# EAGLE board servo_1 (EAGLE 6.5.0)
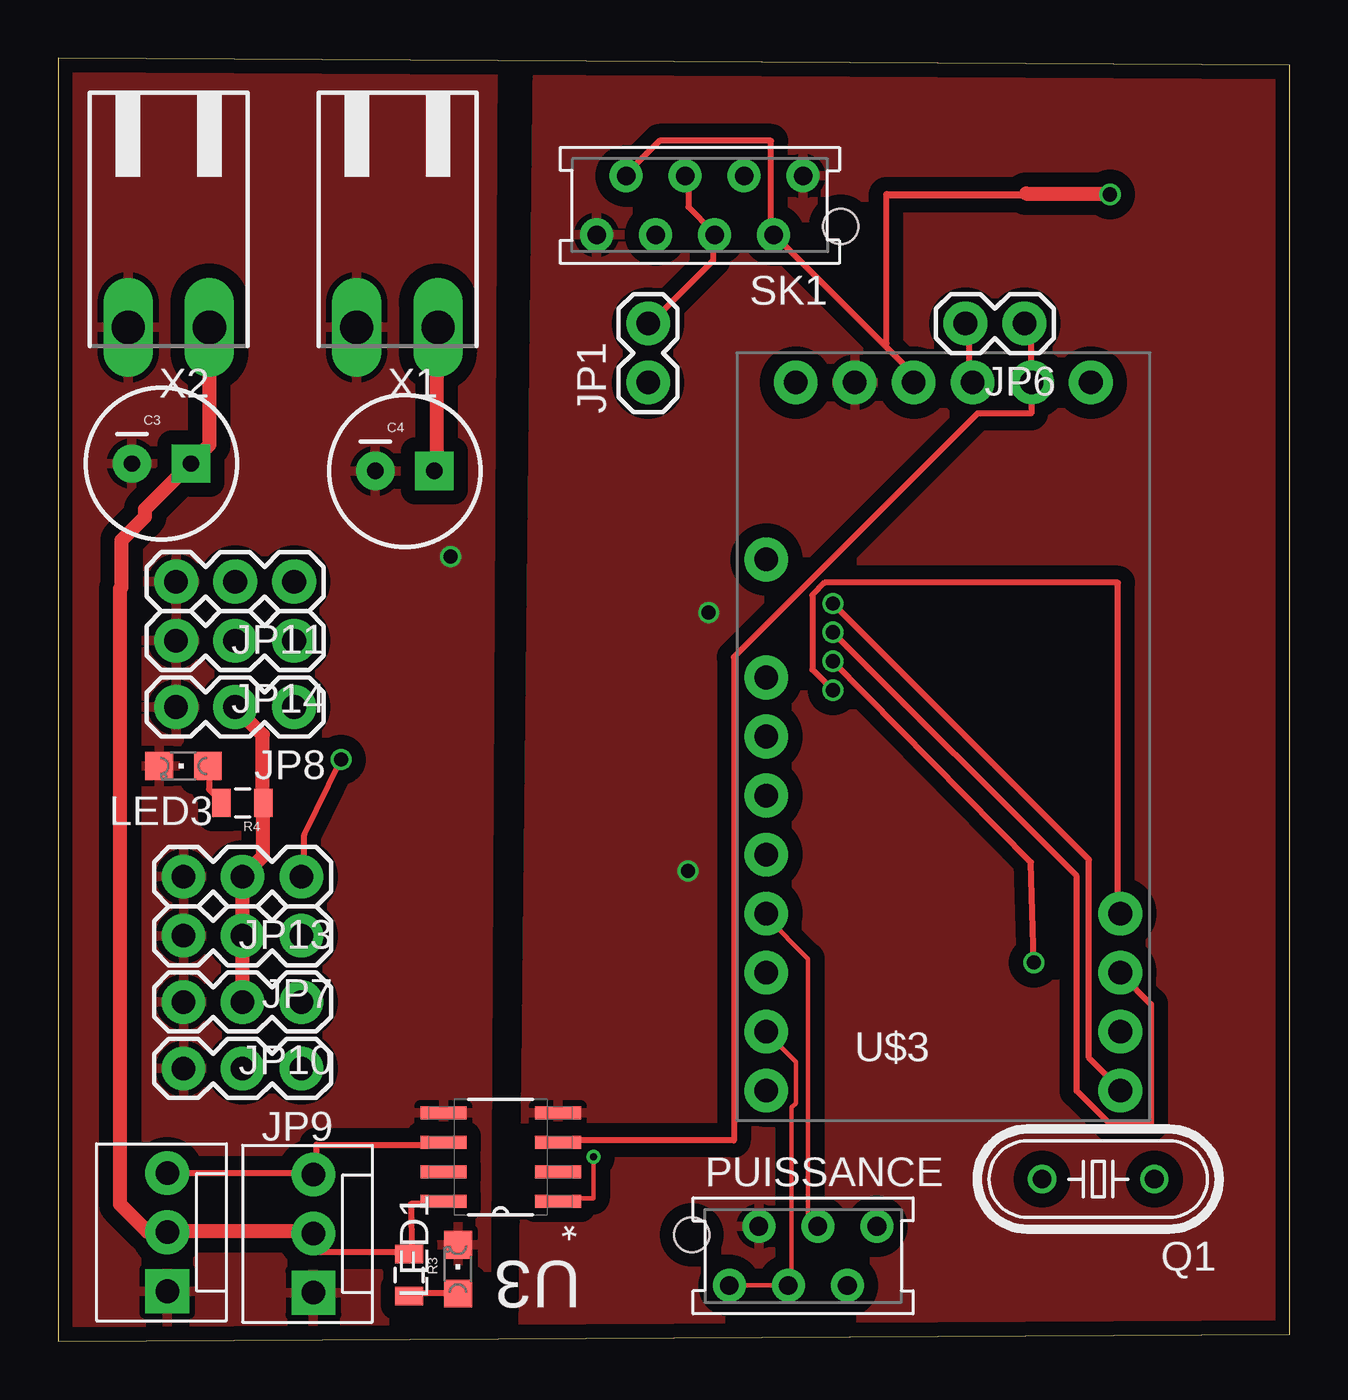
[diagram p0: board, top side]
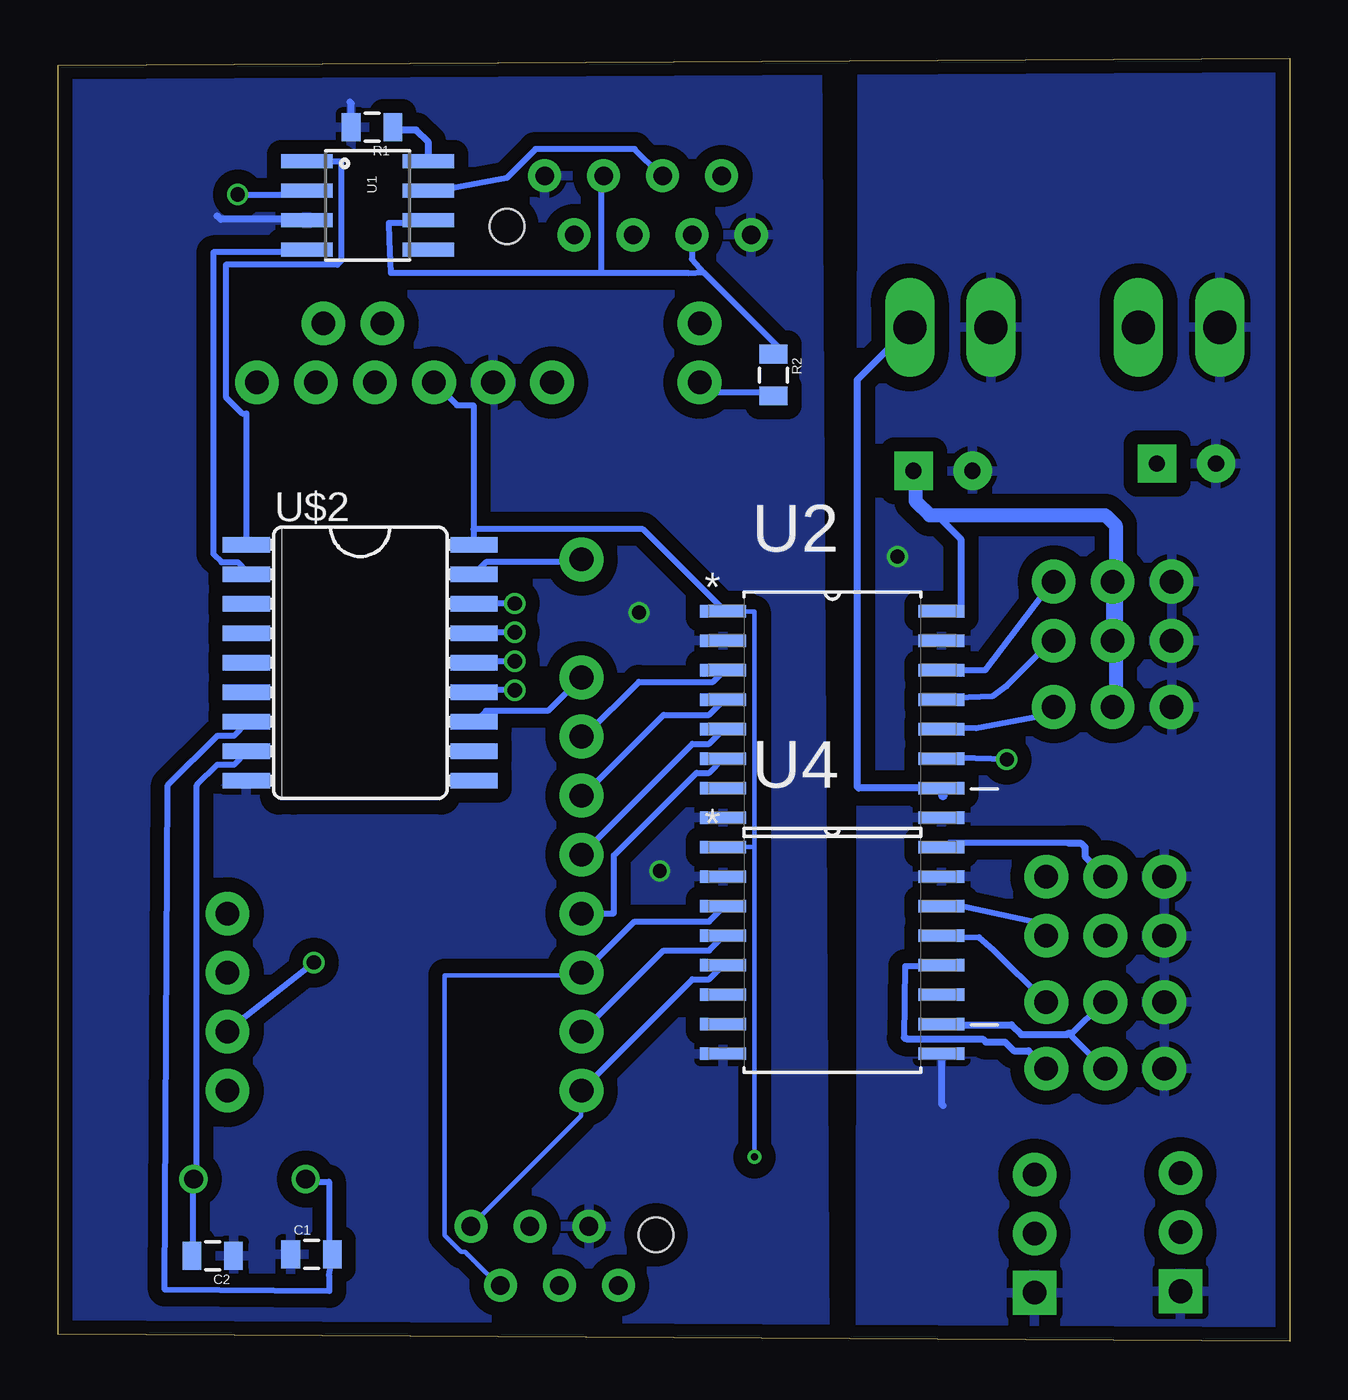
[diagram p1: board, bottom side, seen from below]

Size 53.01 x 55.23 mm. Coordinates in mm from the lower left corner, seen from the top.
Outline: 0,0 53.01,0.32 53.01,54.92 0,55.23 0,0
Copper layers (1*16): Top 0.035mm / dielectric 1.6mm / Bottom 0.035mm
Design rules "dipole": minimum track width 0.2mm, minimum drill 0.3mm, track to track 0.15mm, track to pad 0.15mm, pad to pad 0.15mm, via to via 0.15mm, smd to smd 0.01mm, copper to edge 0.01mm, drill to drill 0.01mm, minimum pad ring 0.15mm, minimum via ring 0.15mm, stop-mask expansion 1mil, vias tented up to drill 0mil, thermal gap 10mil
Net classes: 0 default: clearance 0.205 mm
bRestrict: area 36.5,23.5 to 43.5,34.6

## Footprints (pad centres in the part's own frame; a part is rotated, then mirrored left to right if it is on the bottom)
0805 = smd 0.8 x 1.2: 1 -0.9,0; 2 0.9,0
CPOL-RADIAL-100UF-25V = drill 0.7 pad 1.651 square: 1 1.27,0 | drill 0.7 pad 1.651: 2 -1.27,0
1X02 = drill 1.016 pad 1.88: 1 0,0; 2 2.54,0
MOLEX-1X3 = drill 1.016 pad 1.88 square: 1 0,0 | drill 1.016 pad 1.88: 2 2.54,0; 3 5.08,0
1X03 = drill 1.016 pad 1.88: 1 0,0; 2 2.54,0; 3 5.08,0
CHIPLED_0805 = smd 1.2 x 1.2: A 0,-1.05; C 0,1.05
AMP-215079-6 = drill 0.8 pad 1.422: 1 0,0; 2 1.27,2.54; 3 2.54,0; 4 3.81,2.54; 5 5.08,0; 6 6.35,2.54 | hole 1.5: -1.62,2.175
HC49/S = drill 0.813: 1 -2.413,0; 2 2.413,0
AMP-215079-8 = drill 0.8 pad 1.422: 1 0,-1.27; 2 1.27,1.27; 3 2.54,-1.27; 4 3.81,1.27; 5 5.08,-1.27; 6 6.35,1.27; 7 7.62,-1.27; 8 8.89,1.27 | hole 1.5: -1.62,0.905
SO08 = smd 0.61 x 2.21: 1 -1.905,-2.616; 2 -0.635,-2.616; 3 0.635,-2.616; 4 1.905,-2.616; 5 1.905,2.616; 6 0.635,2.616; 7 -0.635,2.616; 8 -1.905,2.616
SOIC127P1032X265-16N = smd 1.981 x 0.533: 1 -4.699,4.445; 2 -4.699,3.175; 3 -4.699,1.905; 4 -4.699,0.635; 5 -4.699,-0.635; 6 -4.699,-1.905; 7 -4.699,-3.175; 8 -4.699,-4.445; 9 4.699,-4.445; 10 4.699,-3.175; 11 4.699,-1.905; 12 4.699,-0.635; 13 4.699,0.635; 14 4.699,1.905; 15 4.699,3.175; 16 4.699,4.445
SOIC127P600X175-8N = smd 1.981 x 0.559: 1 -2.464,1.905; 2 -2.464,0.635; 3 -2.464,-0.635; 4 -2.464,-1.905; 5 2.464,-1.905; 6 2.464,-0.635; 7 2.464,0.635; 8 2.464,1.905
SO18L = smd 0.66 x 2.032: 1 -5.08,-4.902; 2 -3.81,-4.902; 3 -2.54,-4.902; 4 -1.27,-4.902; 5 0,-4.902; 6 1.27,-4.902; 7 2.54,-4.902; 8 3.81,-4.902; 9 5.08,-4.902; 10 5.08,4.902; 11 3.81,4.902; 12 2.54,4.902; 13 1.27,4.902; 14 0,4.902; 15 -1.27,4.902; 16 -2.54,4.902; 17 -3.81,4.902; 18 -5.08,4.902
ARDUINO_PRO_MINI = drill 1.016 pad 1.88: 3 -7.62,7.62; 5 -7.62,2.54; 6 -7.62,0; 7 -7.62,-2.54; 8 -7.62,-5.08; 9 -7.62,-7.62; 10 -7.62,-10.16; 11 -7.62,-12.7; 12 -7.62,-15.24; 13 7.62,-15.24; 14 7.62,-12.7; 15 7.62,-10.16; 16 7.62,-7.62; BLK -6.35,15.24; GND -3.81,15.24; GRN 6.35,15.24; RXI 1.27,15.24; TXO 3.81,15.24; VCC -1.27,15.24
90-2 = drill 1.422 long: 1 -1.75,5.25; 2 1.75,5.25

## Placement (x,y rotation side)
C1  22pF  [0805]  42.1,3.75 0 bottom
C2  22pF  [0805]  46.35,3.68 180 bottom
C3  100uF  [CPOL-RADIAL-100UF-25V]  4.45,37.78 0 top
C4  100uF  [CPOL-RADIAL-100UF-25V]  14.92,37.47 0 top
JP1  end_lign  [1X02]  25.4,41.28 90 top
JP2  AX-12_1  [MOLEX-1X3]  10.99,2.1 90 top
JP4  AX-12_2  [MOLEX-1X3]  4.7,2.16 90 top
JP6  RX_TX_Connxion  [1X02]  41.59,43.82 180 top
JP7  PWM7  [1X03]  10.48,17.46 180 top
JP8  PWM5  [1X03]  10.16,27.31 180 top
JP9  servo_option_2  [1X03]  10.48,11.75 180 top
JP10  servo_option_1  [1X03]  10.48,14.61 180 top
JP11  PWM3  [1X03]  10.16,32.7 180 top
JP13  PWM6  [1X03]  10.48,20 180 top
JP14  PWM4  [1X03]  10.16,30.16 180 top
LED1  [CHIPLED_0805]  17.21,3.11 0 top
LED3  [CHIPLED_0805]  5.4,24.77 90 top
PUISSANCE  MMATCH-6-  [AMP-215079-6]  28.89,2.41 0 top
Q1  16MHz  [HC49/S]  44.77,6.99 180 top
R1  4,7k  [0805]  39.5,52.26 180 bottom
R2  120  [0805]  22.22,41.59 270 bottom
R3  1k  [0805]  15.11,2.86 270 top
R4  1k  [0805]  7.94,23.18 180 top
SK1  [AMP-215079-8]  32.07,48.9 180 top
U1  MCP2551  [SO08]  39.69,48.9 270 bottom
U2  ADUM1400ARWZ  [SOIC127P1032X265-16N]  19.68,26.99 0 bottom
U3  ADUM1250ARZ  [SOIC127P600X175-8N]  19.05,7.94 180 top
U4  ADUM1400ARWZ  [SOIC127P1032X265-16N]  19.68,16.83 0 bottom
U$2  MCP2515SO  [SO18L]  40,29.21 270 bottom
U$3  ARDUINO_PRO_MINI'SERVO  [ARDUINO_PRO_MINI]  38.1,26.04 0 top
X1  5V_INPUT  [90-2]  14.61,48.9 180 top
X2  12V_INPUT  [90-2]  4.76,48.9 180 top

## Library data of the parts
C1 C2 = SparkFun-Capacitors; MF: AVX; MPN: 08055A220JAT2A; OC_FARNELL: 2280675RL
C3 C4 = SparkFun-Capacitors; MF: RUBYCON; MPN: 100TXW100MEFC8X30; OC_FARNELL: 2346289
JP1 JP6 R1-R4 = SparkFun-Passives; OC_FARNELL: unknown
JP2 JP4 JP7-JP11 JP13 JP14 = SparkFun-Connectors; OC_FARNELL: unknown
LED1 LED3 = adafruit
PUISSANCE = jt-con-micromatch
Q1 = adafruit; MF: MULTICOMP; MPN: HC49SM-3.6864-30-50-60-16-ATF; OC_FARNELL: 1667008; OC_NEWARK: unknown
SK1 = jt-con-micromatch; OC_FARNELL: unknown
U1 = SparkFun-DigitalIC; MF: MICROCHIP; MPN: MCP2551-I/SN...; OC_FARNELL: 2119745
U2 U4 = Analog Devices_By_element14_Batch_1; MF: ANALOG DEVICES; MPN: ADUM1400ARWZ; OC_FARNELL: 1226217; OC_NEWARK: 19M8755; PACKAGE: SOIC-16; SUPPLIER: Analog Devices
U3 = Analog Devices_By_element14_Batch_1; MF: ANALOG DEVICES; MPN: ADUM1250ARZ; OC_FARNELL: 1814353; OC_NEWARK: 27M9880; PACKAGE: SOIC-8; SUPPLIER: Analog Devices
U$2 = MCP2515_MT; OC_FARNELL: unknown
U$3 = can_bus_servo; OC_FARNELL: unknown
X1 X2 = con-weidmueller-sl35; OC_FARNELL: unknown; OC_NEWARK: unknown

## Nets
5V_DIRTY: C4.1 JP7.2 JP8.2 JP9.2 JP10.2 JP11.2 JP13.2 JP14.2 R4.1 U2.10 U2.16 U4.10 U4.16 X1.1
12V_DIRTY: C3.1 JP2.2 JP4.2 R3.1 U3.8 X2.1
CAN_CS: U$2.16 U$3.13
CAN_INT: U$2.12 U$3.5
CAN_RXD: U1.4 U$2.2
CAN_TXD: U1.1 U$2.1
CANH: JP1.2 SK1.4 SK1.5 U1.7
CANL: R2.1 SK1.3 SK1.6 U1.6
GND: C1.1 C2.1 PUISSANCE.2 R1.2 SK1.1 SK1.8 U1.3 U2.2 U2.8 U3.4 U4.2 U4.8 U$2.9 U$3.GND
GND_DIRTY: C3.2 C4.2 JP2.1 JP4.1 JP7.3 JP8.3 JP9.3 JP10.3 JP11.3 JP13.3 JP14.3 LED1.C LED3.C U2.9 U2.15 U3.5 U4.9 U4.15 X1.2 X2.2
MISO: U$2.15 U$3.15
MOSI: U$2.14 U$3.14
N$2: C1.2 Q1.2 U$2.7
N$3: C2.2 Q1.1 U$2.8
N$4: LED1.A R3.2
N$5: R1.1 U1.8
N$6: LED3.A R4.2
N$7: JP1.1 R2.2
OUT4: U2.4 U$3.7
OUT7: PUISSANCE.5 U4.3 U$3.10
OUT8: PUISSANCE.1 PUISSANCE.3 U4.4 U$3.11
PWM3: U2.3 U$3.6
PWM3_OUT: JP11.1 U2.14
PWM4_OUT: JP14.1 U2.13
PWM5: U2.5 U$3.8
PWM5_OUT: JP8.1 U2.12
PWM6: PUISSANCE.4 U2.6 U$3.9
PWM6_OUT: JP13.1 U2.11
PWM7_OUT: JP7.1 U4.14
PWM8_OUT: JP10.1 U4.13
PWM9: PUISSANCE.6 U4.5 U$3.12
PWM9_OUT: JP9.1 U4.12
RST: U$2.17 U$3.3
RXI: JP6.2 U$3.RXI
RXTX_OUT: JP2.3 JP4.3 U3.6
SCK: U$2.13 U$3.16
TXO: JP6.1 U3.3 U$3.TXO
VCC: SK1.2 SK1.7 U1.2 U2.1 U3.1 U4.1 U$2.18 U$3.VCC

## Tracks (layer width: path | path; a pad name or v marks a point on that pad's centre or on a via)
5V_DIRTY
  Top 0.254: 16.28,43.5 X1.1 | 8.81,23.05 R4.1 8.81,23.23 | 8.1,20.03 JP13.2 7.93,19.85 | 7.93,17.54 JP7.2 7.93,17.36 | 7.75,27.14 JP8.2 | 7.93,14.69 JP10.2
  Top 0.61: JP8.2 8.81,26.11 8.81,23.05 8.81,20.88 JP13.2 | 7.93,19.85 7.93,17.48 JP7.2 | 7.93,17.36 7.93,14.62 JP10.2 | 16.28,43.5 16.28,37.55 C4.1
  Bottom 0.254: 15.04,31.58 U2.16 | 16.1,37.45 C4.1 | JP10.2 8.1,14.52 9.35,13.27 9.52,13.27 8.1,11.85 JP9.2 | 9.52,21.45 14.68,21.45 14.86,21.27 U4.16 | 8.1,20.03 JP13.2 | 14.86,13.63 U4.10
  Bottom 0.305: 14.86,13.63 11.98,13.63 11.56,13.21 9.59,13.21 9.52,13.27 | U2.10 18.54,23.81 18.61,23.88 18.61,41.39 X1.1 | 15.49,35.56 15.18,35.56 14.16,34.54 14.16,31.5 14.29,31.37 14.92,31.37 U2.16 | 9.52,21.45 8.99,21.45 8.81,21.27 8.81,20.88 JP13.2
  Bottom 0.61: 16.1,37.45 16.1,36.17 15.49,35.56 7.94,35.56 7.49,35.12 7.49,32.83 | 7.49,32.83 7.49,27.43 JP8.2 | 7.49,32.83 JP11.2 JP14.2
12V_DIRTY
  Top 0.254: U3.8 16.46,5.98 15.19,5.92 15.21,3.85 R3.1 15.04,3.85 11.13,3.85 11.13,4.56 JP2.2 10.95,4.74 | 4.72,4.74 JP4.2 4.55,4.74
  Top 0.61: X2.1 6.51,38.58 C3.1 3.75,35.81 3.75,35.5 2.73,34.48 2.73,32.45 2.67,32.38 2.67,5.91 3.84,4.74 4.74,4.74 | 10.95,4.74 4.74,4.74 | 4.74,4.74 JP4.2
CAN_CS  (via drill 0.61)
  Top 0.254: v33.35,31.76 44.37,20.74 44.37,12.2 45.62,10.96 U$3.13
  Bottom 0.254: v33.35,31.76 34.95,31.76 U$2.16
CAN_INT
  Bottom 0.254: U$2.12 34.95,26.78 34.59,27.14 31.93,27.14 30.5,28.56 U$3.5
CAN_RXD
  Bottom 0.254: U$2.2 44.91,33.19 45.26,33.54 45.97,33.54 46.33,33.9 46.33,46.88 42.42,46.88 U1.4
CAN_TXD
  Bottom 0.254: U$2.1 44.91,39.94 45.08,39.94 45.8,40.65 45.8,46.34 41,46.34 40.82,46.52 40.82,50.79 42.24,50.79 U1.1
CANH
  Top 0.254: SK1.5 27.13,50.08 27.13,48.83 28.19,47.76 SK1.4 28.19,47.59 28.19,46.52 25.53,43.85 JP1.2
  Bottom 0.254: U1.7 36.91,49.54 36.37,49.57 33.71,50.08 32.46,51.32 28.19,51.32 27.13,50.25 SK1.5
CANL
  Bottom 0.254: 25.22,46.01 25.73,46.58 25.73,47.65 25.88,47.59 SK1.6 | 25.22,46.01 21.75,42.54 R2.1 | 29.62,45.99 25.88,45.99 25.22,46.01 | 29.62,45.99 38.68,45.99 38.75,47.41 38.77,48.15 37.88,48.15 37.08,48.12 U1.6 | 29.62,45.99 29.62,50.08 SK1.3
GND  (via drill 0.6)
  Bottom 0.254: 42.42,48.3 U1.3
  Bottom 0.305: R1.2 40.4,53.29 40.45,53.34 | 42.42,48.3 46.01,48.3 46.16,48.45
  other vias: 27.11,20.26 28,31.37
  pour Bottom (isolate 0.61): 20,0 52.07,0.95 53.02,0.95 53.34,54.93 20.32,55.56
  pour Top (isolate 0.61): 20,0.32 53.02,0.95 52.7,54.93 20.64,55.25
GND_DIRTY  (via drill 0.6)
  Bottom 0.305: U4.9 14.99,10.22 14.92,10.16
  other vias: 16.89,33.78
  pour Bottom (isolate 0.61): 0.25,55.44 -0.13,-0.19 18.48,0.13 18.42,55.25 10.6,55.37
  pour Top (isolate 0.61): -0.44,-0.25 18.42,0.13 18.73,55.25 0.57,55.44
MISO  (via drill 0.61)
  Top 0.254: v33.35,30.52 43.84,20.03 43.84,10.78 45.26,9.36 47.04,9.36 47.04,14.52 45.8,15.76 U$3.15
  Bottom 0.254: v33.35,30.52 34.95,30.52 U$2.15
MOSI  (via drill 0.61)
  Top 0.254: v33.35,29.27 41.87,20.62 v42,16.31
  Bottom 0.254: v33.35,29.27 34.95,29.27 U$2.14 | v42,16.31 45.62,13.45 U$3.14
N$1
  Bottom 0.406: 14.92,23.81 14.92,23.49
N$2
  Bottom 0.254: 42.06,6.87 42.24,6.87 Q1.2 42.06,6.87 | 42.06,6.87 41.35,6.87 41.35,3.85 C1.2 41.35,2.84 41.34,2.16 48.41,2.22 48.28,23.94 46.15,26.07 45.44,26.07 44.91,26.61 U$2.7
N$3
  Bottom 0.254: C2.2 47.22,3.85 47.22,6.87 Q1.1 47.04,7.05 47.04,23.94 46.15,24.83 45.44,24.83 44.91,25.36 U$2.8
N$4
  Top 0.254: R3.2 15.21,2.07 17.17,2.07 LED1.A
N$5
  Bottom 0.305: U1.8 37.07,51.61 37.59,52.13 38.47,52.13 R1.1
N$6
  Top 0.254: R4.2 7.04,23.23 6.5,23.76 6.5,24.65 LED3.A
N$7
  Bottom 0.254: R2.2 22.33,40.83 22.68,40.87 25.35,40.87 JP1.1
OUT4
  Bottom 0.2: 30.33,23.58 U$3.7
  Bottom 0.254: 30.33,23.58 26.95,26.96 24.99,26.96 24.46,27.5 U2.4
OUT7
  Bottom 0.2: PUISSANCE.5 34.06,2.43 35.48,3.85 35.66,3.85 36.37,4.56 36.37,15.76 30.5,15.76 U$3.10 30.33,15.94
  Bottom 0.254: 30.33,15.94 28.19,18.07 24.99,18.07 24.46,18.61 U4.3
OUT8
  Top 0.2: PUISSANCE.1 28.9,2.43 31.39,2.43 PUISSANCE.3 31.57,2.43 31.57,10.07 31.75,10.25 31.75,12.03 30.5,13.27 U$3.11
  Bottom 0.2: 30.33,13.45 U$3.11
  Bottom 0.254: 30.33,13.45 26.95,16.83 24.99,16.83 24.46,17.36 U4.4
PWM3
  Bottom 0.254: U2.3 24.46,28.74 24.82,28.38 28.02,28.38 30.33,26.07 U$3.6
PWM3_OUT
  Bottom 0.254: U2.14 14.86,28.92 14.01,28.88 13.12,28.88 10.24,32.65 JP11.1
PWM4_OUT
  Bottom 0.254: U2.13 14.86,27.67 12.8,27.76 12.19,28.21 10.24,30.16 JP14.1
PWM5
  Bottom 0.254: U2.5 24.46,26.25 24.99,25.72 25.71,25.72 30.33,21.09 U$3.8
PWM5_OUT
  Bottom 0.254: U2.12 14.86,26.43 13.5,26.39 10.41,26.96 10.24,27.14 JP8.1
PWM6
  Top 0.2: 30.5,18.25 32.28,16.47 32.28,5.45 32.64,5.09 PUISSANCE.4
  Top 0.254: 30.5,18.25 U$3.9
  Bottom 0.254: U2.6 24.99,24.47 25.53,24.47 29.08,20.92 29.08,18.43 30.33,18.43 U$3.9
PWM6_OUT  (via drill 0.61)
  Top 0.254: v12.18,25.04 10.59,21.81 10.59,20.03 JP13.1
  Bottom 0.254: v12.18,25.04 14.2,25.11 14.86,25.01 U2.11
PWM7_OUT
  Bottom 0.254: U4.14 14.01,18.71 11.13,18.07 10.59,17.54 JP7.1
PWM8_OUT
  Bottom 0.254: U4.13 14.86,17.36 13.37,17.4 12.72,16.83 10.59,14.69 JP10.1
PWM9
  Bottom 0.2: PUISSANCE.6 35.13,5.09 30.5,9.72 30.5,10.78 U$3.12
  Bottom 0.254: U4.5 24.99,15.58 25.71,15.58 30.33,10.96 U$3.12
PWM9_OUT
  Bottom 0.254: 16.59,13.07 16.55,16.15 16.01,16.15 15.04,16.12 U4.12 | 10.59,11.67 JP9.1
  Bottom 0.305: 16.59,13.07 16.46,13.03 16.45,13.02 13.21,13.02 13.08,12.89 12.26,12.89 11.88,12.51 11.24,12.51 JP9.1
RST
  Bottom 0.254: U$2.17 34.95,33.19 34.59,33.54 30.5,33.54 U$3.3
RXI
  Top 0.254: JP6.2 39.22,43.68 39.22,41.36 U$3.RXI
RXTX_OUT
  Top 0.254: U3.6 16.46,8.47 11.13,8.47 11.13,7.23 JP2.3 10.95,7.23 4.72,7.23 JP4.3
SCK  (via drill 0.61)
  Top 0.254: v33.35,28.03 32.46,28.92 32.46,32.12 33,32.65 45.62,32.65 45.62,18.43 U$3.16
  Bottom 0.254: v33.35,28.03 34.95,28.03 U$2.13
TXO
  Top 0.254: U3.3 21.61,8.65 29.08,8.65 29.08,29.45 39.57,39.94 41.89,39.94 41.89,41.19 U$3.TXO 41.89,41.36 41.89,43.5 41.71,43.68 JP6.1
VCC  (via drill 0.3, 0.61)
  Top 0.2: v23.04,7.94 23.04,6.16 21.61,6.16 U3.1
  Top 0.254: 35.57,42.88 36.73,41.72 36.73,41.36 U$3.VCC | 35.57,42.88 30.86,47.59 SK1.2 30.68,47.76 30.68,51.68 25.88,51.68 24.46,50.25 SK1.7 | 35.66,49.36 35.66,42.96 35.57,42.88
  Top 0.305: 35.66,49.36 41.62,49.36 41.66,49.4
  Top 0.61: 41.66,49.4 45.24,49.4 v45.27,49.36
  Bottom 0.2: 23.04,21.27 v23.04,7.94 | U4.1 23.04,21.27 | 23.04,21.27 23.04,31.41 24.28,31.41 U2.1
  Bottom 0.254: 35.13,34.96 35.13,40.3 35.84,40.3 36.73,41.19 U$3.VCC | 35.13,34.96 35.13,34.43 U$2.18 | 35.13,34.96 27.84,34.96 24.46,31.58 U2.1 | v45.27,49.36 42.42,49.36 U1.2